# EAGLE board KH3-Receiver-Breakout (EAGLE 7.5.0)
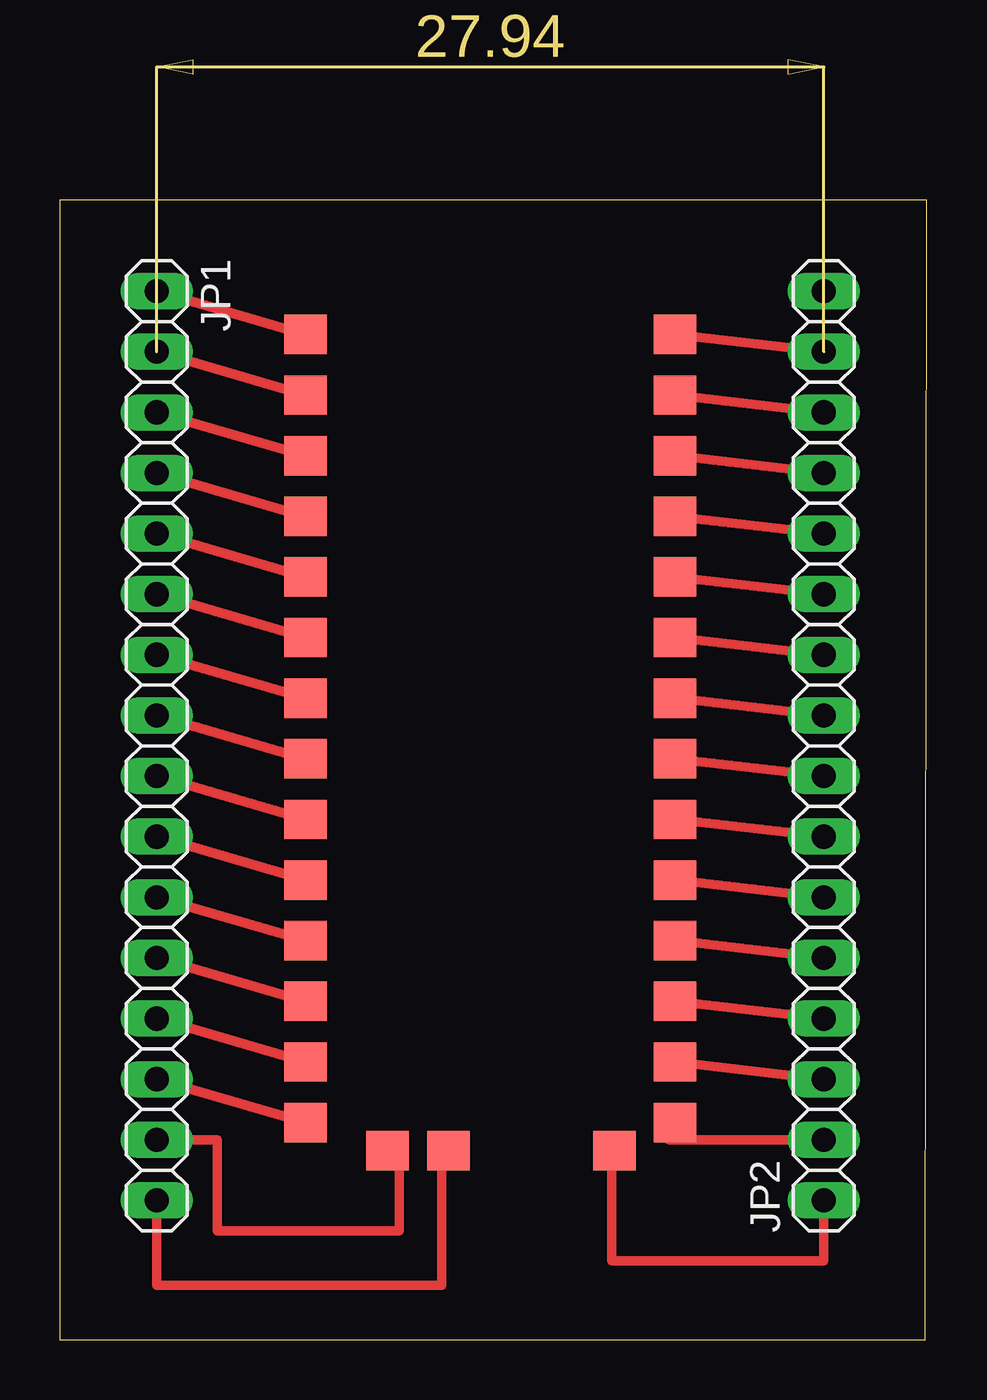
[diagram p0: board, top side]

Size 36.32 x 47.75 mm. Coordinates in mm from the lower left corner, seen from the top.
Outline: 0,0 36.25,0 36.32,47.75 0,47.74 0,0
Copper layers (1*16): Top 0.035mm / dielectric 1.5mm / Bottom 0.035mm
Design rules "MWSEagleDesignRules2": minimum track width 13mil, minimum drill 22mil, track to track 13mil, track to pad 13mil, pad to pad 13mil, via to via 13mil, smd to smd 8mil, copper to edge 40mil, drill to drill 8mil, minimum pad ring 10mil, minimum via ring 8mil, stop-mask expansion 4mil, vias tented up to drill 0mil, thermal gap 10mil

## Footprints (pad centres in the part's own frame; a part is rotated, then mirrored left to right if it is on the bottom)
1X16 = drill 1.016 long: 1 -19.05,0; 2 -16.51,0; 3 -13.97,0; 4 -11.43,0; 5 -8.89,0; 6 -6.35,0; 7 -3.81,0; 8 -1.27,0; 9 1.27,0; 10 3.81,0; 11 6.35,0; 12 8.89,0; 13 11.43,0; 14 13.97,0; 15 16.51,0; 16 19.05,0
KH3-RXM-LINX-315 = smd 1.78 x 1.65: 1 -8,19.52; 2 -8,16.98; 3 -8,14.44; 4 -8,11.9; 5 -8,9.36; 6 -8,6.82; 7 -8,4.28; 8 -8,1.74; 9 -8,-0.8; 10 -8,-3.34; 11 -8,-5.88; 12 -8,-8.42; 13 -8,-10.96; 14 -8,-13.5; 15 7.49,-13.5; 16 7.49,-10.96; 17 7.49,-8.42; 18 7.49,-5.88; 19 7.49,-3.34; 20 7.49,-0.8; 21 7.49,1.74; 22 7.49,4.28; 23 7.49,6.82; 24 7.49,9.36; 25 7.49,11.9; 26 7.49,14.44; 27 7.49,16.98; 28 7.49,19.52; 29 -4.55,-14.67; 30 -2.01,-14.67; 31 4.95,-14.67

## Placement (x,y rotation side)
JP1  [1X16]  4.06,24.89 270 top
JP2  [1X16]  32,24.89 90 top
U$1  KH3-RXM-LINX-315  [KH3-RXM-LINX-315]  18.29,22.61 0 top

## Library data of the parts
JP1 JP2 = pinhead
U$1 = KH3-RXM-LINX-315

## Nets
N$1: JP1.3 U$1.3
N$2: JP1.4 U$1.4
N$3: JP1.5 U$1.5
N$4: JP1.6 U$1.6
N$5: JP1.7 U$1.7
N$6: JP1.8 U$1.8
N$7: JP1.9 U$1.9
N$8: JP1.10 U$1.10
N$9: JP1.11 U$1.11
N$10: JP1.12 U$1.12
N$11: JP1.13 U$1.13
N$12: JP1.14 U$1.14
N$13: JP2.14 U$1.27
N$14: JP1.16 U$1.30
N$15: JP2.13 U$1.26
N$16: JP2.12 U$1.25
N$17: JP2.11 U$1.24
N$18: JP2.10 U$1.23
N$19: JP2.9 U$1.22
N$20: JP2.8 U$1.21
N$21: JP2.7 U$1.20
N$22: JP2.6 U$1.19
N$23: JP2.5 U$1.18
N$24: JP2.4 U$1.17
N$25: JP2.3 U$1.16
N$26: JP2.2 U$1.15
N$27: JP2.1 U$1.31
N$28: JP1.15 U$1.29
N$29: JP2.15 U$1.28
N$30: JP1.2 U$1.2
N$31: JP1.1 U$1.1

## Tracks (layer width: path | path; a pad name or v marks a point on that pad's centre or on a via)
N$1
  Top 0.406: JP1.3 U$1.3
N$2
  Top 0.406: JP1.4 U$1.4
N$3
  Top 0.406: JP1.5 U$1.5
N$4
  Top 0.406: JP1.6 U$1.6
N$5
  Top 0.406: JP1.7 U$1.7
N$6
  Top 0.406: JP1.8 U$1.8
N$7
  Top 0.406: JP1.9 U$1.9
N$8
  Top 0.406: JP1.10 U$1.10
N$9
  Top 0.406: JP1.11 U$1.11
N$10
  Top 0.406: JP1.12 U$1.12
N$11
  Top 0.406: JP1.13 U$1.13
N$12
  Top 0.406: JP1.14 U$1.14
N$13
  Top 0.406: U$1.27 JP2.14
N$14
  Top 0.406: U$1.30 16,7.68 16,2.29 4.06,2.29 JP1.16
N$15
  Top 0.406: U$1.26 JP2.13
N$16
  Top 0.406: U$1.25 JP2.12
N$17
  Top 0.406: U$1.24 JP2.11
N$18
  Top 0.406: U$1.23 JP2.10
N$19
  Top 0.406: U$1.22 JP2.9
N$20
  Top 0.406: U$1.21 JP2.8
N$21
  Top 0.406: U$1.20 JP2.7
N$22
  Top 0.406: U$1.19 JP2.6
N$23
  Top 0.406: U$1.18 JP2.5
N$24
  Top 0.406: U$1.17 JP2.4
N$25
  Top 0.406: U$1.16 JP2.3
N$26
  Top 0.406: JP2.2 25.52,8.38 U$1.15
N$27
  Top 0.406: U$1.31 23.11,7.68 23.11,3.3 32,3.3 JP2.1
N$28
  Top 0.406: U$1.29 14.22,7.68 14.22,4.57 6.6,4.57 6.6,8.38 JP1.15
N$29
  Top 0.406: U$1.28 JP2.15
N$30
  Top 0.406: JP1.2 U$1.2
N$31
  Top 0.406: JP1.1 U$1.1